# Allegro board sophum_esc.brd
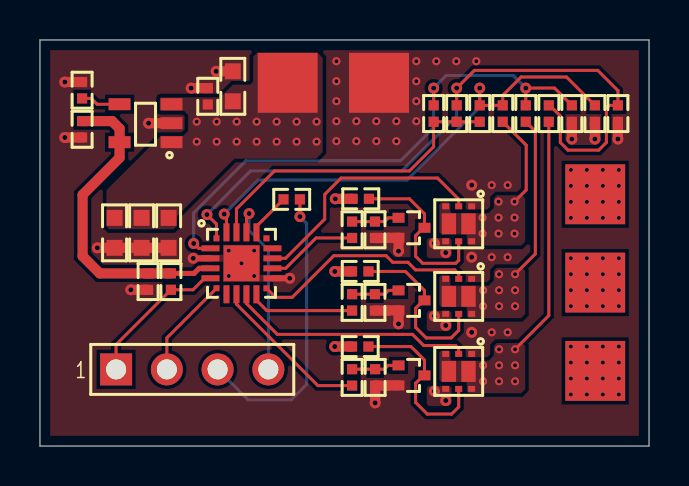
[diagram p0: board, top side]
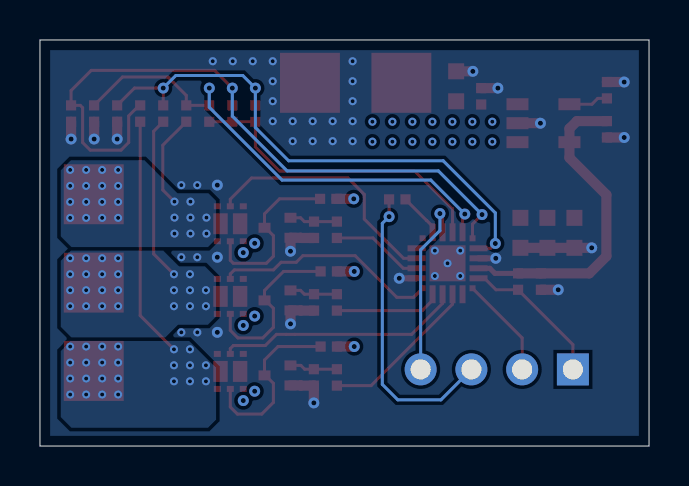
[diagram p1: board, bottom side, seen from below]

Outline 30.48 x 20.32 mm; copper layers: TOP, GND02, PWR03, BOTTOM. Coordinates in mm from the lower left corner of the outline.
Outline path: 0,20.32 30.48,20.32 30.48,0 0,0 0,20.32

## Placement (name value [footprint] x y rotation side)
C1  100nF  [C0402]  5.41 8.23 270 top
C2  22uF  [C0603]  5.09 10.67 270 top
C3  22uF  [C0603]  6.44 10.67 270 top
C4  22uF  [C0603]  3.73 10.67 270 top
C5  10nF  [C0402]  2.11 17.81 90 top
C6  100nF  [C0402]  2.11 15.85 270 top
C7  100nF  [C0402]  8.4 17.5 90 top
C8  22uF  [C0603]  9.65 18 90 top
FET1  PMCPB5530X  [DFN2020-6]  20.95 3.73 270 top
FET2  PMCPB5530X  [DFN2020-6]  20.95 7.49 270 top
FET3  PMCPB5530X  [DFN2020-6]  20.95 11.12 270 top
J1  HEADER-4X1  [HDR4X1-2R54-TM-VM]  3.81 3.84 0 top
Q1  BC847BTT1G  [SC75]  18.59 3.53 0 top
Q2  BC847BTT1G  [SC75]  18.59 7.29 0 top
Q3  BC847BTT1G  [SC75]  18.59 10.92 0 top
R1  1K  [R0402]  6.55 8.23 270 top
R2  1K  [R0402]  15.62 3.43 90 top
R3  10K  [R0402]  16.77 3.43 90 top
R4  100R  [R0402]  16.03 4.98 0 top
R5  1K  [R0402]  15.62 7.19 90 top
R6  10K  [R0402]  16.76 7.19 90 top
R7  100R  [R0402]  16.03 8.74 0 top
R8  1K  [R0402]  15.62 10.82 90 top
R9  10K  [R0402]  16.76 10.82 90 top
R10  100R  [R0402]  16.05 12.37 0 top
R11  10K  [R0402]  22.01 16.64 270 top
R12  10K  [R0402]  23.16 16.64 90 top
R13  10K  [R0402]  19.7 16.64 270 top
R14  10K  [R0402]  24.31 16.64 90 top
R15  10K  [R0402]  20.85 16.64 270 top
R16  10K  [R0402]  25.46 16.64 90 top
R17  2K2  [R0402]  27.77 16.64 270 top
R18  2K2  [R0402]  26.62 16.64 270 top
R19  2K2  [R0402]  28.92 16.64 270 top
R20  1K  [R0402]  12.6 12.34 0 top
TP1  TEST_POINT  [SR3R00X3R00]  12.4 18.18 0 top
TP2  TEST_POINT  [SR3R00X3R00]  16.97 18.18 0 top
TP3  TEST_POINT  [SR3R00X3R00]  27.79 12.6 0 top
TP4  TEST_POINT  [SR3R00X3R00]  27.79 8.18 0 top
TP5  TEST_POINT  [SR3R00X3R00]  27.79 3.76 0 top
U1  EFM8BB10F8G  [QFN20-0R50-3X3EP1R80X1R80]  10.08 9.14 0 top
U2  LP2985AIM5-3.3/NOPB  [SOT23-5]  5.28 16.15 180 top

## Library data of the parts
C1-C8 = CAPACITOR-NON-POL
FET1-FET3 = PMCPB5530X
J1 = HEADER-4X1
Q1-Q3 = BC847BTT1G
R1-R20 = RESISTOR
TP1-TP5 = TEST_POINT
U1 = EFM8BB10F8G
U2 = LP2985AIM5-3.3/NOPB

## Footprints (pads in the part's own frame, mm; a bottom-side part is the same pattern mirrored in y, then rotated)
C0402
  rect 0.51x0.51 smd: 1(-0.41,0) 2(0.41,0)
C0603
  rect 0.8x0.8 smd: 1(-0.75,0) 2(0.75,0)
DFN2020-6
  rect 0.3x0.35 smd: 1(-0.875,0.65) 2(-0.875,0) 3(-0.875,-0.65) 4(0.875,-0.65) 5(0.875,0) 6(0.875,0.65)
  rect 1.05x0.72 smd: 7(0,0.49) 8(0,-0.49)
HDR4X1-2R54-TM-VM
  rect 1.6x1.6 hole 1: 1(0,0)
  round 1.6 hole 1: 2(2.54,0) 3(5.08,0) 4(7.62,0)
QFN20-0R50-3X3EP1R80X1R80
  rect 0.3x0.3 smd: 1(-1.25,1.25) 6(-1.25,-1.25) 11(1.25,-1.25) 16(1.25,1.25)
  rect 0.9x0.3 smd: 2(-1.55,0.75) 3(-1.55,0.25) 4(-1.55,-0.25) 5(-1.55,-0.75) 12(1.55,-0.75) 13(1.55,-0.25) 14(1.55,0.25) 15(1.55,0.75)
  rect 0.3x0.9 smd: 7(-0.75,-1.55) 8(-0.25,-1.55) 9(0.25,-1.55) 10(0.75,-1.55) 17(0.75,1.55) 18(0.25,1.55) 19(-0.25,1.55) 20(-0.75,1.55)
  rect 1.8x1.8 smd: 21(0,0)
R0402
  rect 0.51x0.51 smd: 1(-0.41,0) 2(0.41,0)
SC75
  rect 0.6x0.5 smd: 1(-0.65,0.5) 2(-0.65,-0.5) 3(0.65,0)
SOT23-5
  rect 1.1x0.6 smd: 1(-1.3,0.95) 2(-1.3,0) 3(-1.3,-0.95) 4(1.3,-0.95) 5(1.3,0.95)
SR3R00X3R00
  rect 3x3 smd: 1(0,0)

## Nets
GND: C1.2 C2.2 C3.2 C4.2 C5.2 C6.2 C7.2 C8.2 FET1.1(N_S) FET2.1(N_S) FET3.1(N_S) Q1.2(E) Q2.2(E) Q3.2(E) R3.1 R6.1 R9.1 R17.2 R18.2 R19.2 TP2.1 U1.3(GND#3) U1.12(GND#12) U1.21(GND#21) U2.2(GND)
VCC: C2.1 C3.1 C4.1 C7.1 C8.1 FET1.4(P_S) FET2.4(P_S) FET3.4(P_S) R4.1 R7.1 R10.1 TP1.1 U2.1(IN) U2.3(ON/OFF)
VCC_3V3: C1.1 C6.1 R1.1 U1.4(VDD) U2.5(OUT)
C2CK: J1.1 R1.2 U1.5(RSTB/C2CK)
C2D: J1.2 U1.6(P2.0/C2D)
P0.0: R13.1 R14.2 R18.1 U1.2(P0.0)
P0.1: R15.1 R16.2 R19.1 U1.1(P0.1)
P0.2: R11.1 R12.2 R17.1 U1.20(P0.2)
P0.3: R11.2 R13.2 R15.2 U1.19(P0.3)
P1.0: FET3.2(N_G) U1.14(P1.0)
P1.1: R8.1 U1.13(P1.1)
P1.2: FET2.2(N_G) U1.11(P1.2)
P1.3: R5.1 U1.10(P1.3)
P1.4: FET1.2(N_G) U1.9(P1.4)
P1.5: R2.1 U1.8(P1.5)
PHASE_A: FET3.3(P_D0) FET3.6(N_D0) FET3.7(N_D1) FET3.8(P_D1) R12.1 TP3.1
PHASE_B: FET2.3(P_D0) FET2.6(N_D0) FET2.7(N_D1) FET2.8(P_D1) R14.1 TP4.1
PHASE_C: FET1.3(P_D0) FET1.6(N_D0) FET1.7(N_D1) FET1.8(P_D1) R16.1 TP5.1
RC_IN: J1.3 R20.2
TX: J1.4 U1.18(P0.4)
N00735: Q1.1(B) R2.2 R3.2
N00995: FET1.5(P_G) Q1.3(C) R4.2
N01535: R20.1 U1.17(P0.5)
N01952: Q2.1(B) R5.2 R6.2
N02054: FET2.5(P_G) Q2.3(C) R7.2
N02485: Q3.1(B) R8.2 R9.2
N02587: FET3.5(P_G) Q3.3(C) R10.2
N06310: C5.1 U2.4(BYPASS)

Pads without a net: U1 7 15 16

## Via types
v1: diameter 0.55, hole 0.254, TOP to BOTTOM, 36 vias
v2: diameter 0.406, hole 0.203, TOP to BOTTOM, 115 vias

## Routing (per net, layer and track width the routed paths; a pad name or vN(x,y) marks a point on that pad's centre or on a via; arc(x,y) is an arc through that point)
GND: length 19.1
  TOP w0.305: U1.3 v1(7.67,9.39) ; U1.12 v1(12.5,8.39)
  TOP w0.508: v1(2.87,9.92) C4.2 C2.2 C3.2 ; R17.2 v1(27.77,15.36) ; C8.2 v1(8.82,18.75) ; U2.2 v1(5.44,16.15) ; R18.2 v1(26.62,15.36) ; Q1.2 17.44,3.03 17.43,3.02 R3.1 v1(16.77,2.16) ; C6.2 v1(1.24,15.44) ; v1(17.94,9.75) Q3.2 17.44,10.42 17.43,10.41 R9.1 ; v1(17.94,6.11) Q2.2 17.44,6.79 17.43,6.78 R6.1 ; R19.2 v1(28.92,15.36) ; C1.2 v1(4.55,7.82) ; C5.2 v1(1.24,18.22) ; C7.2 v1(7.56,17.91)
  vias: v1(21.6,13.06) v1(21.6,9.45) v1(21.6,5.69) v2(9.45,9.78) v2(9.45,8.51) v2(10.08,9.14) v2(10.72,9.78) v2(10.72,8.51) v2(14.83,19.26) v2(14.83,18.26) v2(14.83,17.26) v2(14.83,16.26) v2(14.83,15.26) v2(15.83,16.26) v2(15.83,15.26) v2(16.83,16.26) v2(16.83,15.26) v2(17.83,16.26) v2(17.83,15.26) v2(18.83,19.26) v2(18.83,18.26) v2(18.83,17.26) v2(18.83,16.26) v2(19.83,19.26) v2(20.83,19.26) v2(21.83,19.26) v2(22.61,13.06) v2(22.61,9.45) v2(22.61,5.69) v2(23.41,13.06) v2(23.41,9.45) v2(23.41,5.69)
VCC: length 2.6
  TOP w0.508: R7.1 v1(14.75,8.74) ; R4.1 v1(14.75,4.98) ; R10.1 v1(14.78,12.37)
  vias: v1(19.74,10.15) v1(19.74,6.5) v1(19.74,2.74) v1(20.31,9.68) v1(20.31,6.03) v1(20.31,2.28) v2(7.84,16.23) v2(7.84,15.23) v2(8.84,16.23) v2(8.84,15.23) v2(9.84,16.23) v2(9.84,15.23) v2(10.84,16.23) v2(10.84,15.23) v2(11.84,16.23) v2(11.84,15.23) v2(12.84,16.23) v2(12.84,15.23) v2(13.84,16.23) v2(13.84,15.23)
VCC_3V3: length 16
  TOP w0.254: U1.4 7.97,8.89 7.71,8.64 R1.1
  TOP w0.508: C6.1 3.61,16.26 3.98,15.89 U2.5 3.98,14.42 2.13,12.57 2.13,9.5 2.99,8.64 C1.1 R1.1
C2CK: length 7.3
  TOP w0.152: J1.1 3.81,5.08 R1.2 7.66,7.82 8.23,8.39 U1.5
C2D: length 5.1
  TOP w0.152: U1.6 6.35,5.41 J1.2
P0.0: length 27.7
  TOP w0.152: R13.1 v1(19.7,17.91) ; R14.2 v1(24.31,17.91) 25.75,17.91 R18.1 ; U1.2 7.94,9.89 7.7,10.13 v1(7.69,10.13)
  BOTTOM w0.152: v1(24.31,17.91) 23.68,18.54 20.33,18.54 v1(19.7,17.91) 19.7,15.94 18.03,14.27 10.3,14.27 7.69,11.67 v1(7.69,10.13)
P0.1: length 34.9
  TOP w0.152: v1(8.36,11.58) 8.83,11.11 U1.1 ; R15.1 v1(20.85,17.91) 21.74,18.8 27.91,18.8 28.92,17.79 R19.1 28.46,17.05 28.35,16.93 28.35,15.19 27.96,14.81 26.42,14.81 26.04,15.19 26.04,16.52 25.51,17.05 R16.2
  BOTTOM w0.152: v1(8.36,11.58) 10.54,13.77 18.11,13.77 20.85,16.51 v1(20.85,17.91)
P0.2: length 25
  TOP w0.152: R17.1 26.35,18.47 24.08,18.47 23.16,17.55 R12.2 R11.1 v1(22.01,17.91) ; U1.20 9.33,11.49 v1(9.22,11.61)
  BOTTOM w0.152: v1(22.01,17.91) 22.01,16.95 18.36,13.31 10.92,13.31 v1(9.22,11.61)
P0.3: length 15.9
  TOP w0.152: U1.19 9.83,11.87 11.73,13.77 18.49,13.77 19.7,14.98 R13.2 R15.2 R11.2
P1.0: length 12.5
  TOP w0.152: U1.14 12.29,9.39 14.25,11.36 14.25,12.59 15.07,13.41 19.89,13.41 20.95,12.35 FET3.2
P1.1: length 4.6
  TOP w0.152: U1.13 12.3,8.89 13.82,10.41 R8.1
P1.2: length 11.3
  TOP w0.152: U1.11 11.79,7.44 12.62,7.44 14.71,9.53 17.32,9.53 17.65,9.19 18.42,9.19 18.8,8.81 20.75,8.81 20.95,8.61 FET2.2
P1.3: length 5.3
  TOP w0.152: R5.1 11.35,6.78 10.83,7.29 U1.10
P1.4: length 12.3
  TOP w0.152: FET1.2 20.95,4.88 20.8,5.03 19.2,5.03 18.64,5.59 18.16,5.59 18.16,5.59 17.72,5.59 17.72,5.59 11.88,5.59 10.33,7.13 U1.9
P1.5: length 8
  TOP w0.152: R2.1 13.91,3.02 9.83,7.1 U1.8
PHASE_A: length 4.7
  TOP w0.152: R12.1 24.33,15.05 24.33,12.81 v2(23.75,12.23)
  vias: v2(22.15,11.43) v2(22.15,10.63) v2(22.95,12.23) v2(22.95,11.43) v2(22.95,10.63) v2(23.75,11.43) v2(23.75,10.63) v2(26.57,13.82) v2(26.57,13.02) v2(26.57,12.22) v2(26.57,11.42) v2(27.37,13.82) v2(27.37,13.02) v2(27.37,12.22) v2(27.37,11.42) v2(28.17,13.82) v2(28.17,13.02) v2(28.17,12.22) v2(28.17,11.42) v2(28.97,13.82) v2(28.97,13.02) v2(28.97,12.22) v2(28.97,11.42)
PHASE_B: length 8.2
  TOP w0.152: v2(23.77,8.6) 24.79,9.61 24.79,15.75 R14.1
  vias: v2(22.17,7.8) v2(22.17,7) v2(22.97,8.6) v2(22.97,7.8) v2(22.97,7) v2(23.77,7.8) v2(23.77,7) v2(26.57,9.4) v2(26.57,8.6) v2(26.57,7.8) v2(26.57,7) v2(27.37,9.4) v2(27.37,8.6) v2(27.37,7.8) v2(27.37,7) v2(28.17,9.4) v2(28.17,8.6) v2(28.17,7.8) v2(28.17,7) v2(28.97,9.4) v2(28.97,8.6) v2(28.97,7.8) v2(28.97,7)
PHASE_C: length 12.1
  TOP w0.152: R16.1 25.46,6.53 v2(23.77,4.84)
  vias: v2(22.17,4.04) v2(22.17,3.24) v2(22.97,4.84) v2(22.97,4.04) v2(22.97,3.24) v2(23.77,4.04) v2(23.77,3.24) v2(26.57,4.98) v2(26.57,4.18) v2(26.57,3.38) v2(26.57,2.58) v2(27.37,4.98) v2(27.37,4.18) v2(27.37,3.38) v2(27.37,2.58) v2(28.17,4.98) v2(28.17,4.18) v2(28.17,3.38) v2(28.17,2.58) v2(28.97,4.98) v2(28.97,4.18) v2(28.97,3.38) v2(28.97,2.58)
RC_IN: length 14.8
  TOP w0.152: R20.2 v1(13.01,11.48)
  BOTTOM w0.152: J1.3 10.41,2.31 12.57,2.31 13.35,3.09 13.35,11.14 v1(13.01,11.48)
TX: length 9.2
  TOP w0.152: v1(10.46,11.63) 10.33,11.5 U1.18
  BOTTOM w0.152: J1.4 11.43,9.82 10.46,10.78 v1(10.46,11.63)
N00735: length 2.4
  TOP w0.152: Q1.1 17.42,4.03 17.23,3.84 R3.2 R2.2
N00995: length 8.9
  TOP w0.152: R4.2 18.57,4.98 19.24,4.3 Q1.3 19.19,3.53 18.8,3.14 18.8,2.18 19.38,1.6 20.6,1.6 20.95,1.96 FET1.5
N01535: length 2.2
  TOP w0.152: U1.17 10.83,10.99 11.13,11.29 11.13,11.29 R20.1
N01952: length 2.4
  TOP w0.152: R5.2 R6.2 17.25,7.6 17.44,7.79 Q2.1
N02054: length 8.6
  TOP w0.152: R7.2 18.29,8.74 19.24,7.78 Q2.3 19.19,7.29 18.8,6.89 18.8,5.94 19.33,5.41 20.57,5.41 20.95,5.79 FET2.5
N02485: length 2.4
  TOP w0.152: Q3.1 17.44,11.42 17.25,11.23 R9.2 R8.2
N02587: length 8.7
  TOP w0.152: FET3.5 20.95,9.3 20.8,9.14 19.15,9.14 18.8,9.5 18.8,10.53 19.19,10.92 Q3.3 19.24,11.62 18.49,12.37 R10.2
N06310: length 2
  TOP w0.152: U2.4 2.86,17.1 2.57,17.4 C5.1

## Copper pours and planes (outline as drawn; the poured copper is in the pictures)
GND on TOP: 0.51,0.51 0.51,19.81 29.97,19.81 29.97,0.51 ; 8 cut-outs
GND on BOTTOM: 0.51,0.51 0.51,19.81 29.97,19.81 29.97,0.51 ; 2 cut-outs
GND on GND02: 0.51,0.51 0.51,19.81 29.97,19.81 29.97,0.51
VCC on TOP: 20.6,2.12 20.6,2.91 20.5,3.01 19.46,3.01 19.36,2.91 19.36,2.1 19.46,2 20.47,2
VCC on TOP: 10.87,19.68 13.89,19.68 14.15,19.43 14.15,14.71 13.82,14.38 9.73,14.38 6.83,11.48 6.83,11 6.68,10.85 3.48,10.85 3.33,11 3.33,12.8 6.05,15.52 7.16,15.52 7.42,15.77 7.42,16.56 7.21,16.76 6.07,16.76 5.99,16.84 5.99,17.37 6.07,17.45 9.02,17.45 9.65,18.08 10.52,18.08 10.67,18.24 10.67,19.48
VCC on TOP: 20.6,5.88 20.6,6.67 20.5,6.77 19.46,6.77 19.36,6.67 19.36,5.86 19.46,5.76 20.47,5.76
VCC on TOP: 20.6,9.53 20.6,10.31 20.5,10.41 19.46,10.41 19.35,10.31 19.35,9.5 19.46,9.4 20.47,9.4
VCC on PWR03: 0.51,0.51 0.51,19.81 29.97,19.81 29.97,0.51
PHASE_A on TOP: 20.09,12.19 20.45,12.19 20.54,12.1 20.54,11.72 20.6,11.66 22.45,11.66 22.71,11.91 22.71,12.4 22.86,12.55 24.13,12.55 24.28,12.4 24.28,10.24 24.08,10.03 21.46,10.03 21.36,10.13 21.36,10.54 21.31,10.59 20.09,10.59 19.99,10.69 19.99,12.09
PHASE_A on BOTTOM: 28.93,14.3 29.44,13.79 29.44,10.49 28.91,9.96 22.07,9.96 21.67,10.36 21.67,12.27 22.05,12.65 23.6,12.65 25.25,14.3
PHASE_B on TOP: 20.09,8.56 20.45,8.56 20.54,8.47 20.54,8.09 20.6,8.03 22.45,8.03 22.71,8.28 22.71,8.76 22.86,8.92 24.13,8.92 24.28,8.76 24.28,6.6 24.08,6.4 21.46,6.4 21.36,6.5 21.36,6.91 21.31,6.96 20.09,6.96 19.99,7.06 19.99,8.46
PHASE_B on BOTTOM: 24.31,9.78 28.93,9.78 29.44,9.27 29.44,5.97 28.91,5.44 24.21,5.44 23.57,6.07 22.07,6.07 21.67,6.48 21.67,8.43 22.23,8.99 23.52,8.99
PHASE_C on TOP: 20.09,4.8 20.45,4.8 20.54,4.71 20.54,4.33 20.6,4.27 22.45,4.27 22.71,4.52 22.71,5 22.86,5.16 24.13,5.16 24.28,5 24.28,2.84 24.08,2.64 21.46,2.64 21.36,2.74 21.36,3.15 21.31,3.2 20.09,3.2 19.99,3.3 19.99,4.7
PHASE_C on BOTTOM: 28.93,5.26 29.44,4.75 29.44,1.45 28.91,0.91 22.07,0.91 21.67,1.32 21.67,3.91 23.01,5.26

## Text on the board
NCLEGEND-1-4: FIGURE | SIZE | 8.0 | 10.0 | 39.37 | DRILL CHART: TOP to BOTTOM | ALL UNITS ARE IN MILS | PLATED | QTY | 115 | 36 | 4
